# Altium PCB Motor Controller.PcbDoc (part 2 of 2)
Units mil, origin at the board's own origin, x right, y up, seen from the top; angles counter-clockwise.
Board outline 1811.02 x 1811.02 mil, 4 copper layers (Top Layer, Mid-Layer 1, Mid-Layer 2, Bottom Layer); 65 components, 62 nets, 262 pads, 173 vias.
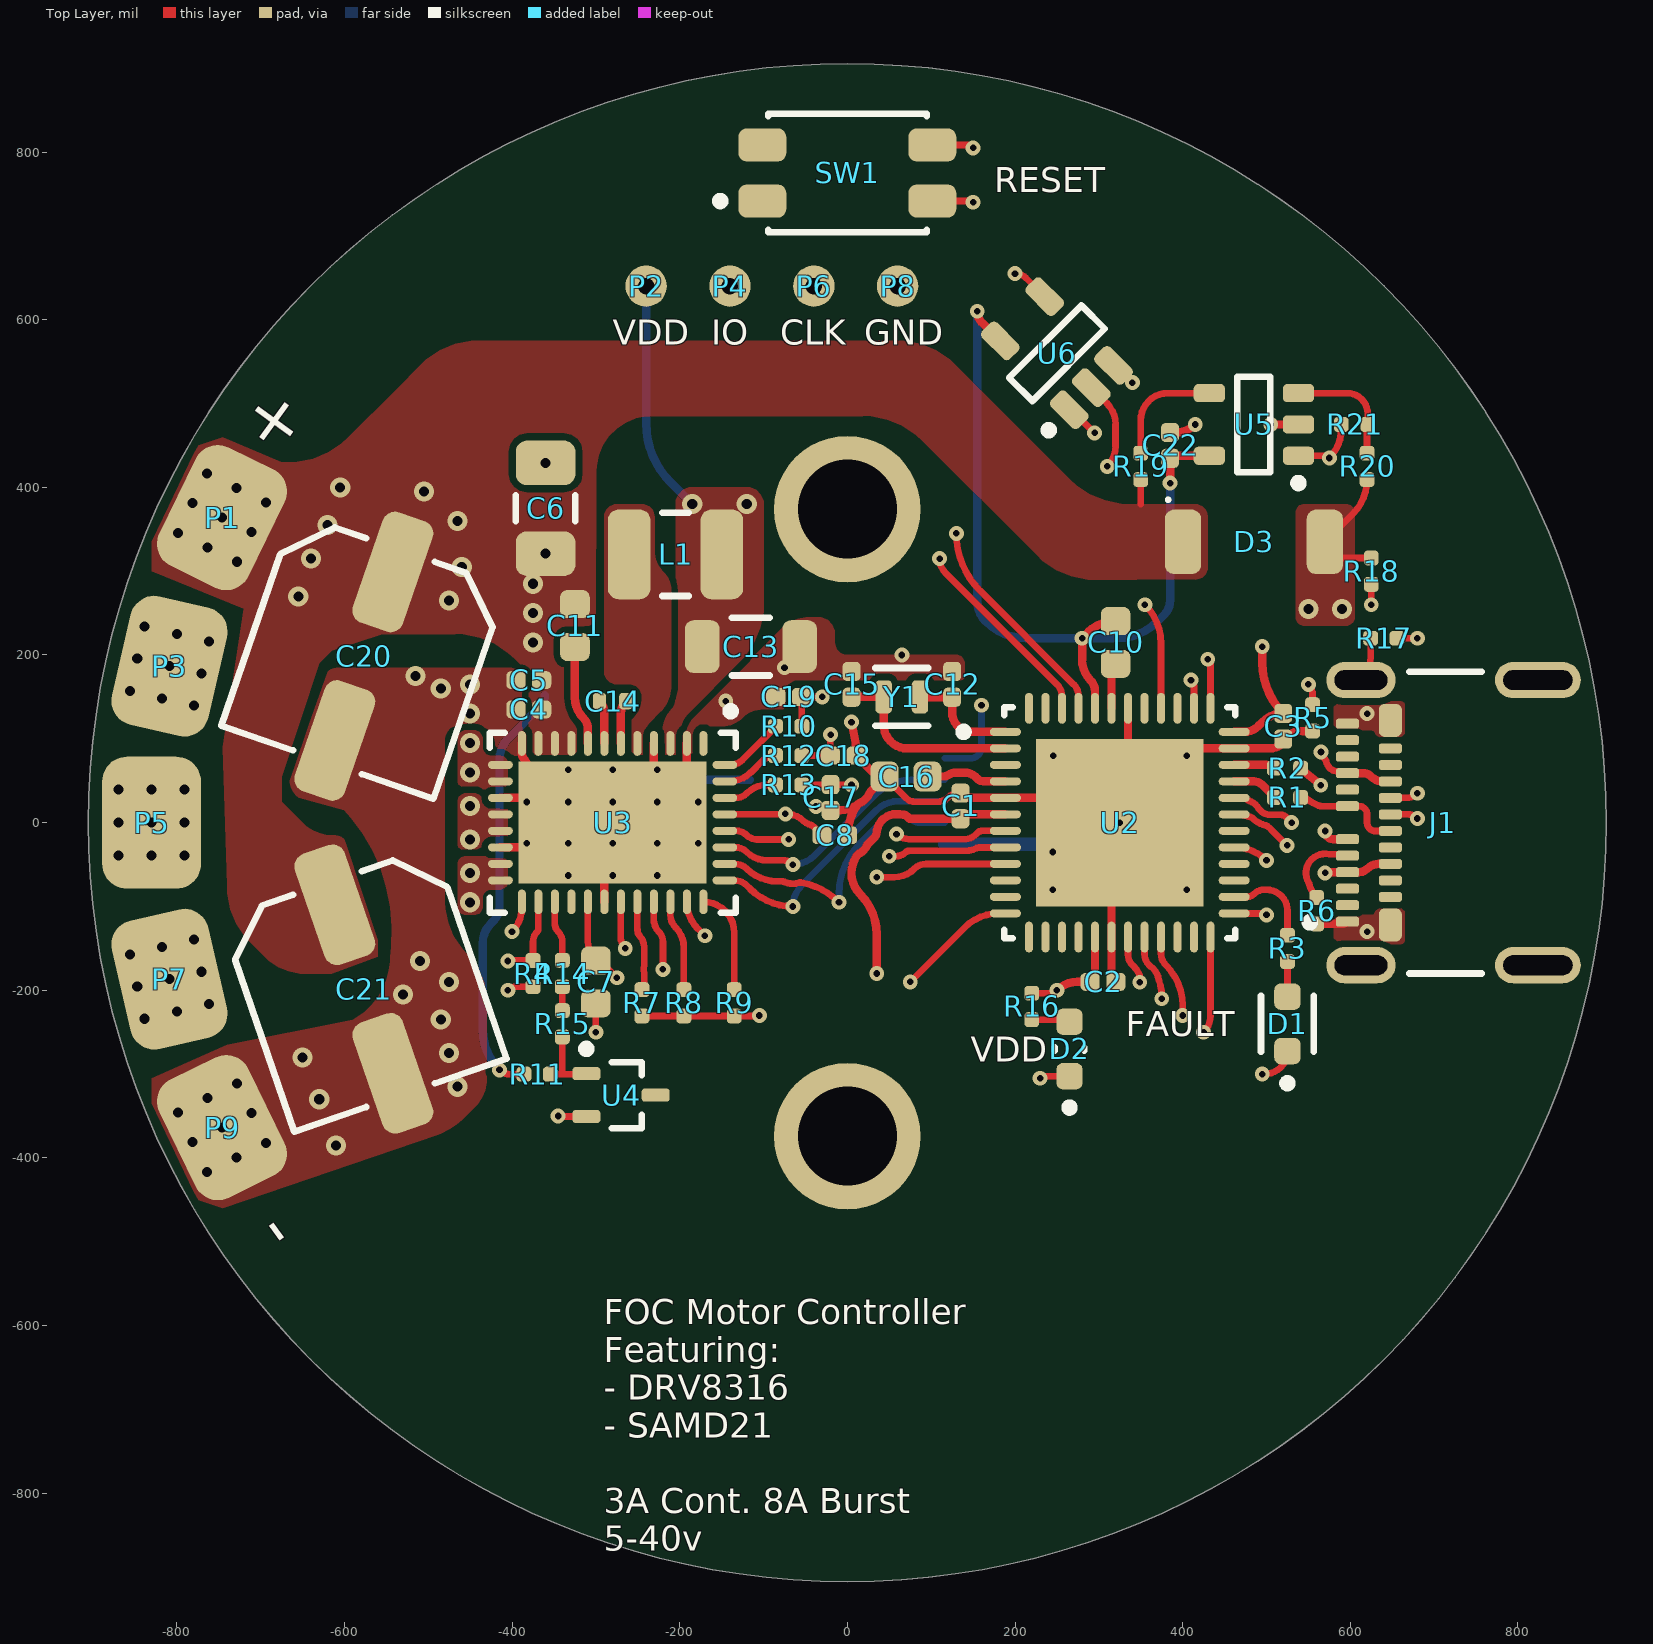
[diagram p0: Top Layer view]

## Polygon pours and split planes (outlines as drawn) (continued)
GND on Mid-Layer 1 "GNDPOUR" (solid, pour order 0): -905.51,0 ccw(c0,0) 0,-905.51 ccw(c0,0) 905.51,0 ccw(c0,0) 0,905.51 ccw(c0,0)

## Silkscreen, mask and mechanical layers (free items; w line width, h text height)
Top Overlay:
  text "RESET" at 175,752 h30
  text "VDD" at -279.99,570 h30
  text "IO" at -162.49,570 h30
  text "CLK" at -79.99,570 h30
  text "GND" at 20.01,570 h30
  text "+" at -683.99,521.66 h60 r234
  text "FAULT" at 332.05,-255 h30
  text "VDD" at 147.03,-285 h30
  text "-" at -707.5,-489.31 h60 r306
  text "FOC Motor Controller / Featuring: / - DRV8316 / - SAMD21 /  / 3A Cont. 8A Burst / 5-40v" at -290.41,-868.56 h30
Bottom Overlay:
  region: 1653 vertices and 1 holes, not listed, extent -170.69,-793.62 188.35,-515.48
  text "VS" at -689.54,308.51 h30 r244
  text "U" at -737.89,160.1 h30 r257
  text "V" at -755,-10 h30 r270
  text "W" at -733.4,-179.58 h30 r283
  text "GND" at -661.06,-366.91 h30 r296
Board Shape:
  circle w10: c0,0 r905.51
Mechanical 13:
  lines w10: 43.35,121.56 ccw(c76.33,121.56) 76.33,88.58